# EAGLE board lcd (EAGLE 7.7.0)
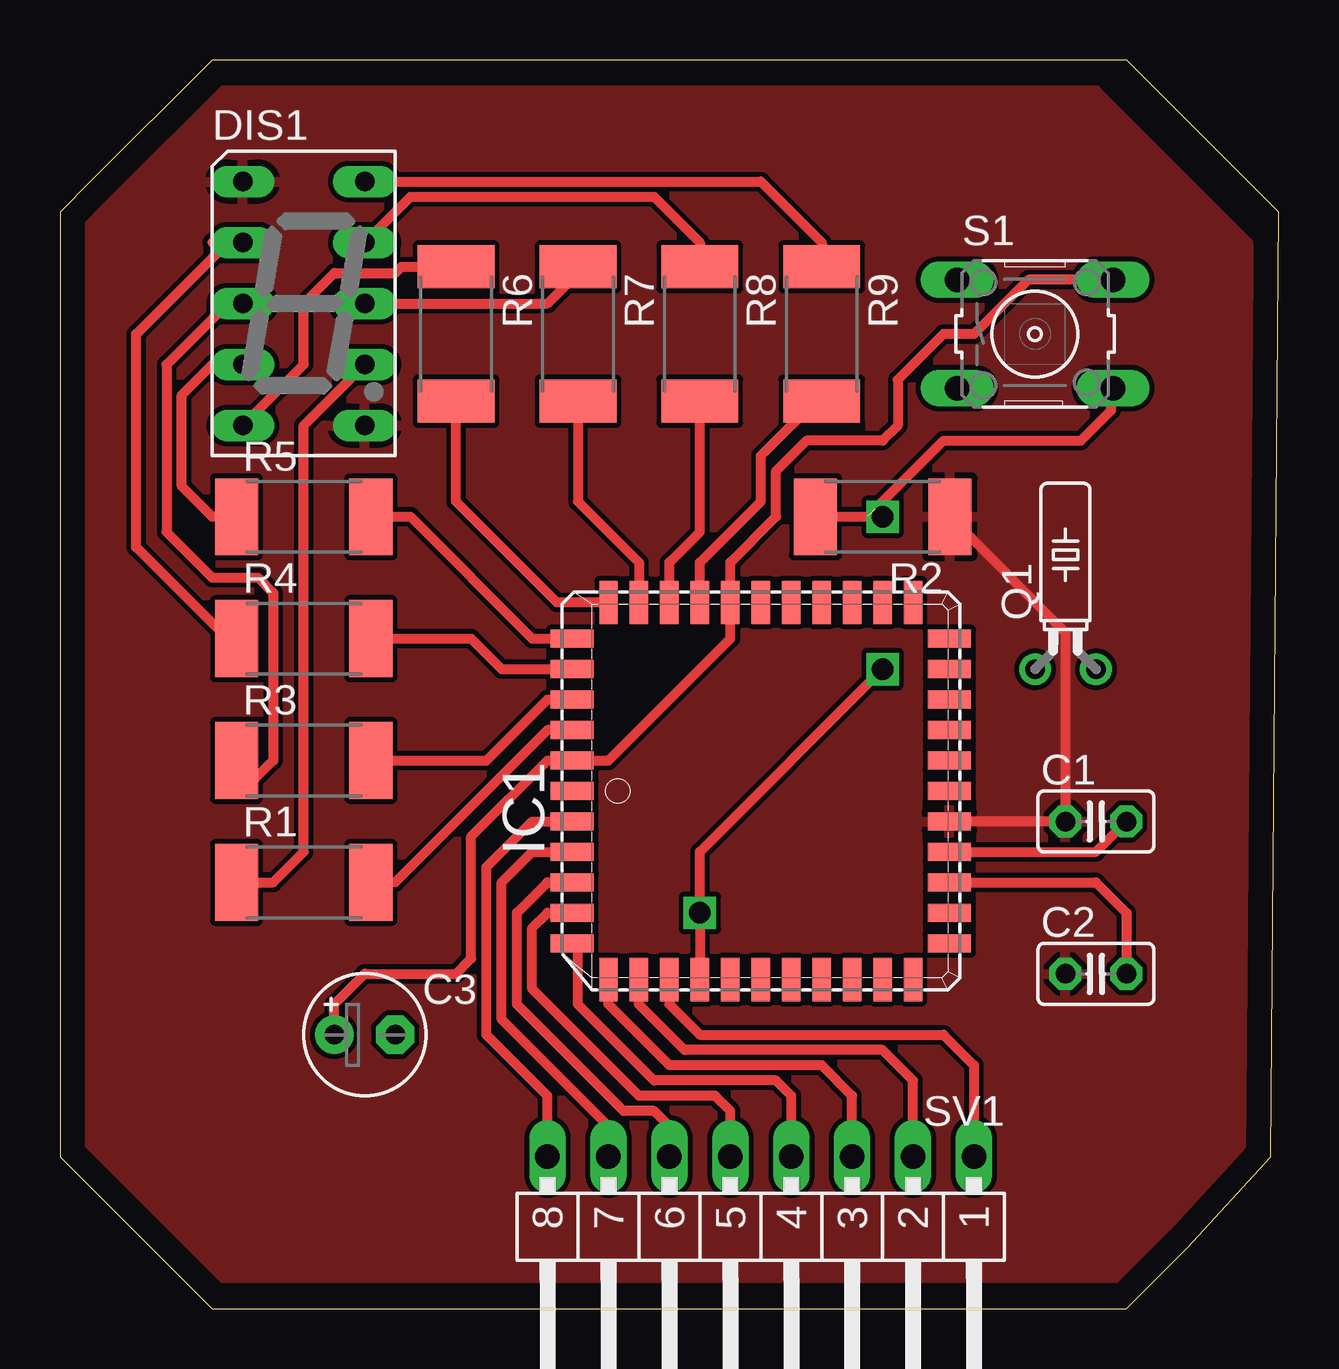
[diagram p0: board, top side]
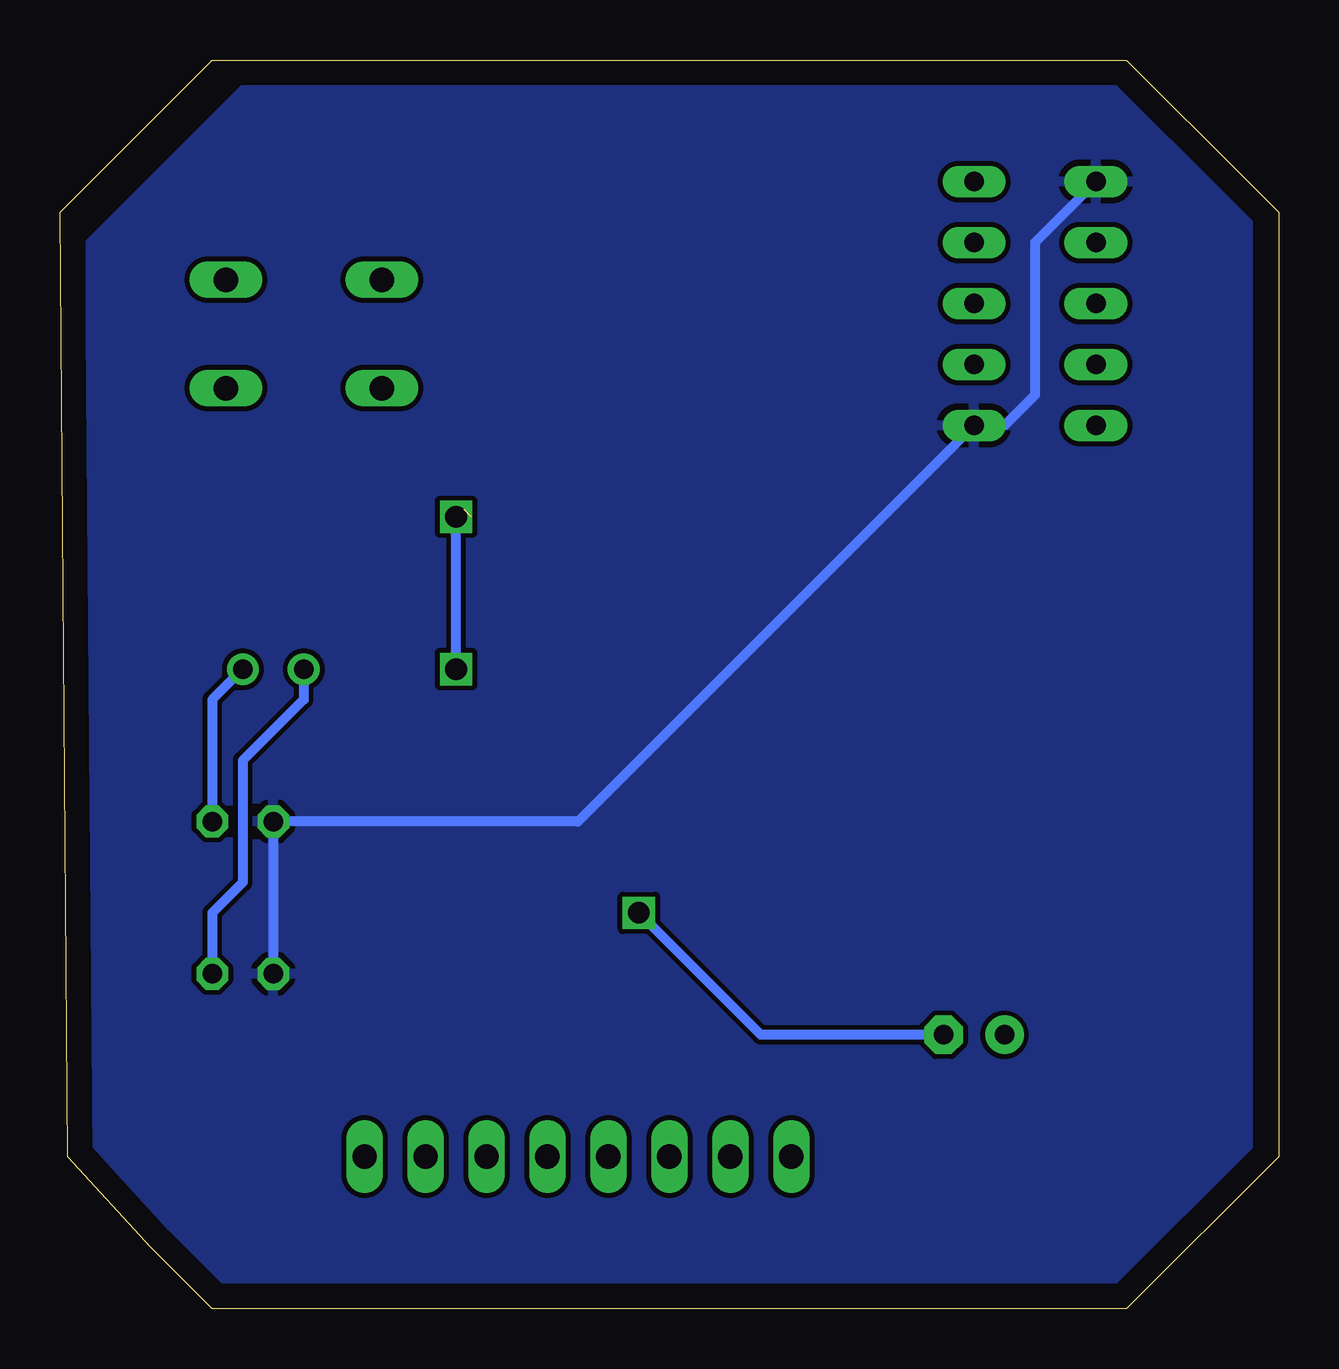
[diagram p1: board, bottom side, seen from below]

Size 50.8 x 52.06 mm. Coordinates in mm from the lower left corner, seen from the top.
Outline: 0,6.35 6.35,0 44.45,0 46.99,2.54 50.47,6.35 50.8,45.72 44.46,52.06 6.35,52.06 1.27,46.99 0,45.72 0,6.35
Copper layers (1*16): Top 0.035mm / dielectric 1.5mm / Bottom 0.035mm
Design rules "default": minimum track width 10mil, minimum drill 24mil, track to track 8mil, track to pad 8mil, pad to pad 8mil, via to via 8mil, smd to smd 8mil, copper to edge 40mil, drill to drill 8mil, minimum pad ring 10mil, minimum via ring 8mil, stop-mask expansion 4mil, vias tented up to drill 0mil, thermal gap 10mil

## Footprints (pad centres in the part's own frame; a part is rotated, then mirrored left to right if it is on the bottom)
C025-025X050 = drill 0.813 octagon: 1 -1.27,0; 2 1.27,0
E2,5-5 = drill 0.813 pad 1.6: + -1.27,0 | drill 0.813 pad 1.6 octagon: - 1.27,0
HDSP-A = drill 0.813 long: 1 -2.54,5.08; 2 -2.54,2.54; 3 -2.54,0; 4 -2.54,-2.54; 5 -2.54,-5.08; 6 2.54,-5.08; 7 2.54,-2.54; 8 2.54,0; 9 2.54,2.54; 10 2.54,5.08
PLCC44 = smd 1.8 x 0.76: 1 -7.86,0; 2 -7.86,-1.27; 3 -7.86,-2.54; 4 -7.86,-3.81; 5 -7.86,-5.08; 6 -7.86,-6.35; 18 7.86,-6.35; 19 7.86,-5.08; 20 7.86,-3.81; 21 7.86,-2.54; 22 7.86,-1.27; 23 7.86,0; 24 7.86,1.27; 25 7.86,2.54; 26 7.86,3.81; 27 7.86,5.08; 28 7.86,6.35; 40 -7.86,6.35; 41 -7.86,5.08; 42 -7.86,3.81; 43 -7.86,2.54; 44 -7.86,1.27 | smd 0.76 x 1.8: 7 -6.35,-7.86; 8 -5.08,-7.86; 9 -3.81,-7.86; 10 -2.54,-7.86; 11 -1.27,-7.86; 12 0,-7.86; 13 1.27,-7.86; 14 2.54,-7.86; 15 3.81,-7.86; 16 5.08,-7.86; 17 6.35,-7.86; 29 6.35,7.86; 30 5.08,7.86; 31 3.81,7.86; 32 2.54,7.86; 33 1.27,7.86; 34 0,7.86; 35 -1.27,7.86; 36 -2.54,7.86; 37 -3.81,7.86; 38 -5.08,7.86; 39 -6.35,7.86
TC26H = drill 0.813: 1 -1.27,0; 2 1.27,0
R2512 = smd 1.8 x 3.2: 1 -2.8,0; 2 2.8,0
B3F-10XX = drill 1.016 long: 1 -3.251,2.261; 2 3.251,2.261; 3 -3.251,-2.261; 4 3.251,-2.261
MA08-1W = drill 1.016 long: 1 -8.89,0; 2 -6.35,0; 3 -3.81,0; 4 -1.27,0; 5 1.27,0; 6 3.81,0; 7 6.35,0; 8 8.89,0

## Placement (x,y rotation side)
C1  33pF  [C025-025X050]  43.18,20.32 0 top
C2  33pf  [C025-025X050]  43.18,13.97 0 top
C3  10uF  [E2,5-5]  12.7,11.43 0 top
DIS1  HD-A103  [HDSP-A]  10.16,41.91 0 top
IC1  AT89C51-12JC  [PLCC44]  29.21,21.59 0 top
Q1  11.0592MHz  [TC26H]  41.91,26.67 0 top
R1  330  [R2512]  10.16,17.78 0 top
R2  8.2k  [R2512]  34.29,33.02 180 top
R3  330  [R2512]  10.16,22.86 0 top
R4  330  [R2512]  10.16,27.94 0 top
R5  330  [R2512]  10.16,33.02 0 top
R6  330  [R2512]  16.51,40.64 270 top
R7  330  [R2512]  21.59,40.64 270 top
R8  330  [R2512]  26.67,40.64 270 top
R9  330  [R2512]  31.75,40.64 270 top
S1  RESET  [B3F-10XX]  40.64,40.64 0 top
SV1  [MA08-1W]  29.21,6.35 180 top

## Library data of the parts
C1-C3 R1-R9 = rcl
DIS1 = display-hp; OC_FARNELL: unknown; OC_NEWARK: unknown
IC1 = atmel; MPN: AT89C51ED2-SLSUM; OC_FARNELL: 1095722; OC_NEWARK: 78K5790
Q1 = crystal; OC_FARNELL: unknown; OC_NEWARK: unknown
S1 = switch-omron; MPN: B3F-1000; OC_FARNELL: 176432; OC_NEWARK: 36M3542
SV1 = con-lstb; OC_FARNELL: unknown; OC_NEWARK: unknown

## Nets
GND: C1.1 C2.1 DIS1.1 DIS1.6 IC1.22 R2.1
N$1: IC1.9 SV1.1
N$2: IC1.8 SV1.2
N$3: IC1.7 SV1.3
N$4: IC1.6 SV1.4
N$5: IC1.5 SV1.5
N$6: IC1.4 SV1.6
N$7: IC1.3 SV1.7
N$8: IC1.2 SV1.8
N$9: IC1.43 R1.2
N$10: IC1.42 R3.2
N$11: IC1.41 R4.2
N$12: C1.2 IC1.21 Q1.2
N$13: C2.2 IC1.20 Q1.1
N$14: IC1.40 R5.2
N$15: IC1.39 R6.2
N$16: IC1.38 R7.2
N$17: C3.- IC1.10 R2.2 S1.4
N$18: IC1.37 R8.2
N$19: IC1.36 R9.2
N$20: DIS1.7 R1.1
N$21: DIS1.10 R9.1
N$22: DIS1.9 R8.1
N$23: DIS1.8 R7.1
N$24: DIS1.5 R6.1
N$25: DIS1.4 R5.1
N$26: DIS1.2 R4.1
N$27: DIS1.3 R3.1
VCC: C3.+ IC1.35 IC1.44 S1.2

## Tracks (layer width: path | path; a pad name or v marks a point on that pad's centre or on a via)
GND
  Top 0.406: IC1.22 C1.1 41.91,28.2 R2.1
  Bottom 0.406: C2.1 C1.1 29.21,20.32 DIS1.6 11.43,36.83 10.16,38.1 10.16,44.45 DIS1.1
  pour Top: 6.35,50.8 43.18,50.8 49.53,44.45 49.53,6.35 44.45,1.27 6.35,1.27 1.27,6.35 1.27,45.72
  pour Bottom: 6.35,50.8 43.18,50.8 49.53,44.45 49.53,6.35 44.45,1.27 6.35,1.27 1.27,6.35 1.27,45.72
N$1
  Top 0.406: IC1.9 25.4,12.7 26.67,11.43 36.83,11.43 38.1,10.16 SV1.1
N$2
  Top 0.406: SV1.2 35.56,9.52 34.29,10.8 26.04,10.8 24.13,12.7 IC1.8
N$3
  Top 0.406: SV1.3 33.02,8.89 31.75,10.16 25.4,10.16 22.86,12.7 IC1.7
N$4
  Top 0.406: SV1.4 30.48,8.89 29.85,9.52 24.76,9.52 21.59,12.7 21.59,15 IC1.6
N$5
  Top 0.406: SV1.5 27.94,8.26 27.31,8.89 24.13,8.89 19.68,13.34 19.68,15.88 20.32,16.51 IC1.5
N$6
  Top 0.406: SV1.6 25.4,7.62 24.76,8.26 23.5,8.26 19.05,12.7 19.05,16.51 20.32,17.78 IC1.4
N$7
  Top 0.406: SV1.7 22.86,7.62 18.42,12.07 18.42,17.78 19.68,19.05 IC1.3
N$8
  Top 0.406: SV1.8 20.32,8.89 17.78,11.43 17.78,18.41 19.68,20.32 IC1.2
N$9
  Top 0.406: IC1.43 20.32,24.13 13.97,17.78 R1.2
N$10
  Top 0.406: R3.2 17.78,22.86 20.32,25.4 IC1.42
N$11
  Top 0.406: R4.2 17.14,27.94 18.42,26.67 IC1.41
N$12
  Top 0.406: IC1.21 43.18,19.05 C1.2
  Bottom 0.406: Q1.2 44.45,25.4 C1.2
N$13
  Top 0.406: IC1.20 43.18,17.78 44.45,16.51 C2.2
  Bottom 0.406: Q1.1 40.64,25.4 43.18,22.86 43.18,17.78 44.45,16.51 C2.2
N$14
  Top 0.406: R5.2 14.61,33.02 19.68,27.94 IC1.40
N$15
  Top 0.406: IC1.39 20.71,29.45 16.51,33.66 R6.2
N$16
  Top 0.406: R7.2 21.59,33.66 24.13,31.12 IC1.38
N$17  (via drill 0.9)  (1 unrouted)
  Top 0.406: R2.2 33.66,33.02 36.83,36.2 42.55,36.2 43.81,37.47 43.81,38.3 S1.4 | IC1.10 v26.67,16.51 26.67,19.05 v34.29,26.67
  Bottom 0.406: C3.- 21.59,11.43 v26.67,16.51 | v34.29,26.67 v34.29,33.02 33.97,33.34
N$18
  Top 0.406: IC1.37 25.4,31.12 26.67,32.38 R8.2
N$19
  Top 0.406: IC1.36 26.67,31.12 29.21,33.66 29.21,35.56 31.75,38.1 R9.2
N$20
  Top 0.406: R1.1 8.89,17.78 10.16,19.05 10.16,36.83 DIS1.7
N$21
  Top 0.406: DIS1.10 29.21,46.99 31.75,44.45 R9.1
N$22
  Top 0.406: DIS1.9 14.61,46.35 24.76,46.35 26.67,44.45 R8.1
N$23
  Top 0.406: DIS1.8 20.32,41.91 21.59,43.18 R7.1
N$24
  Top 0.406: DIS1.5 10.16,39.37 10.16,41.91 11.43,43.18 13.97,43.18 14.23,43.44 R6.1
N$25
  Top 0.406: R5.1 6.35,33.02 5.08,34.29 5.08,38.1 6.35,39.37 DIS1.4
N$26
  Top 0.406: DIS1.2 6.98,44.45 | 6.98,44.45 6.35,44.45 | R4.1 6.98,27.94 3.18,31.75 3.18,40.64 6.98,44.45
N$27
  Top 0.406: DIS1.3 6.98,41.91 4.45,39.37 4.45,32.38 6.35,30.48 8.25,30.48 8.89,29.84 8.89,22.86 7.62,21.59 7.62,22.6 R3.1
VCC
  Top 0.406: C3.+ 11.43,12.7 12.7,13.97 16.51,13.97 17.14,14.61 17.14,19.69 20.32,22.86 IC1.44 22.86,22.86 27.94,27.94 IC1.35 27.94,31.12 29.85,33.02 29.85,34.93 31.11,36.2 34.29,36.2 34.92,36.83 34.92,38.74 36.83,40.64 38.1,40.64 40.36,42.9 S1.2